# Altium PCB lcd_breakout.PcbDoc
Units mil, origin at the board's own origin, x right, y up, seen from the top; angles counter-clockwise.
Board outline 3080 x 1540 mil, 2 copper layers (Top Layer, Bottom Layer); 3 components, 46 nets, 110 pads, 0 vias.
Unrouted connection lines stored in the file: 48.
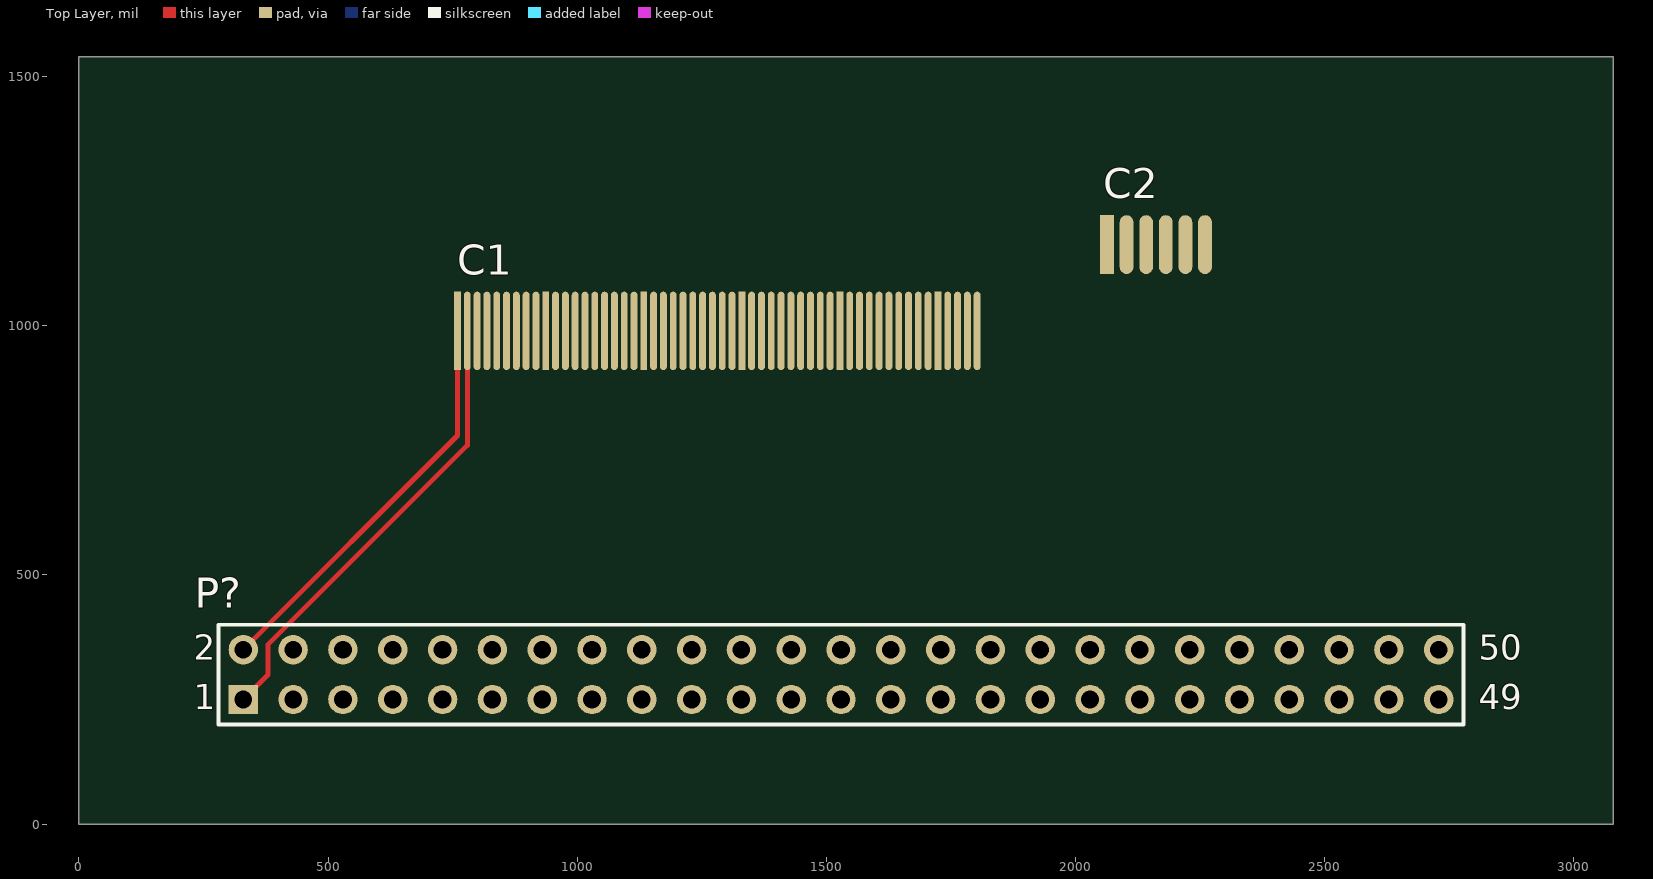
[diagram p0: Top Layer view]
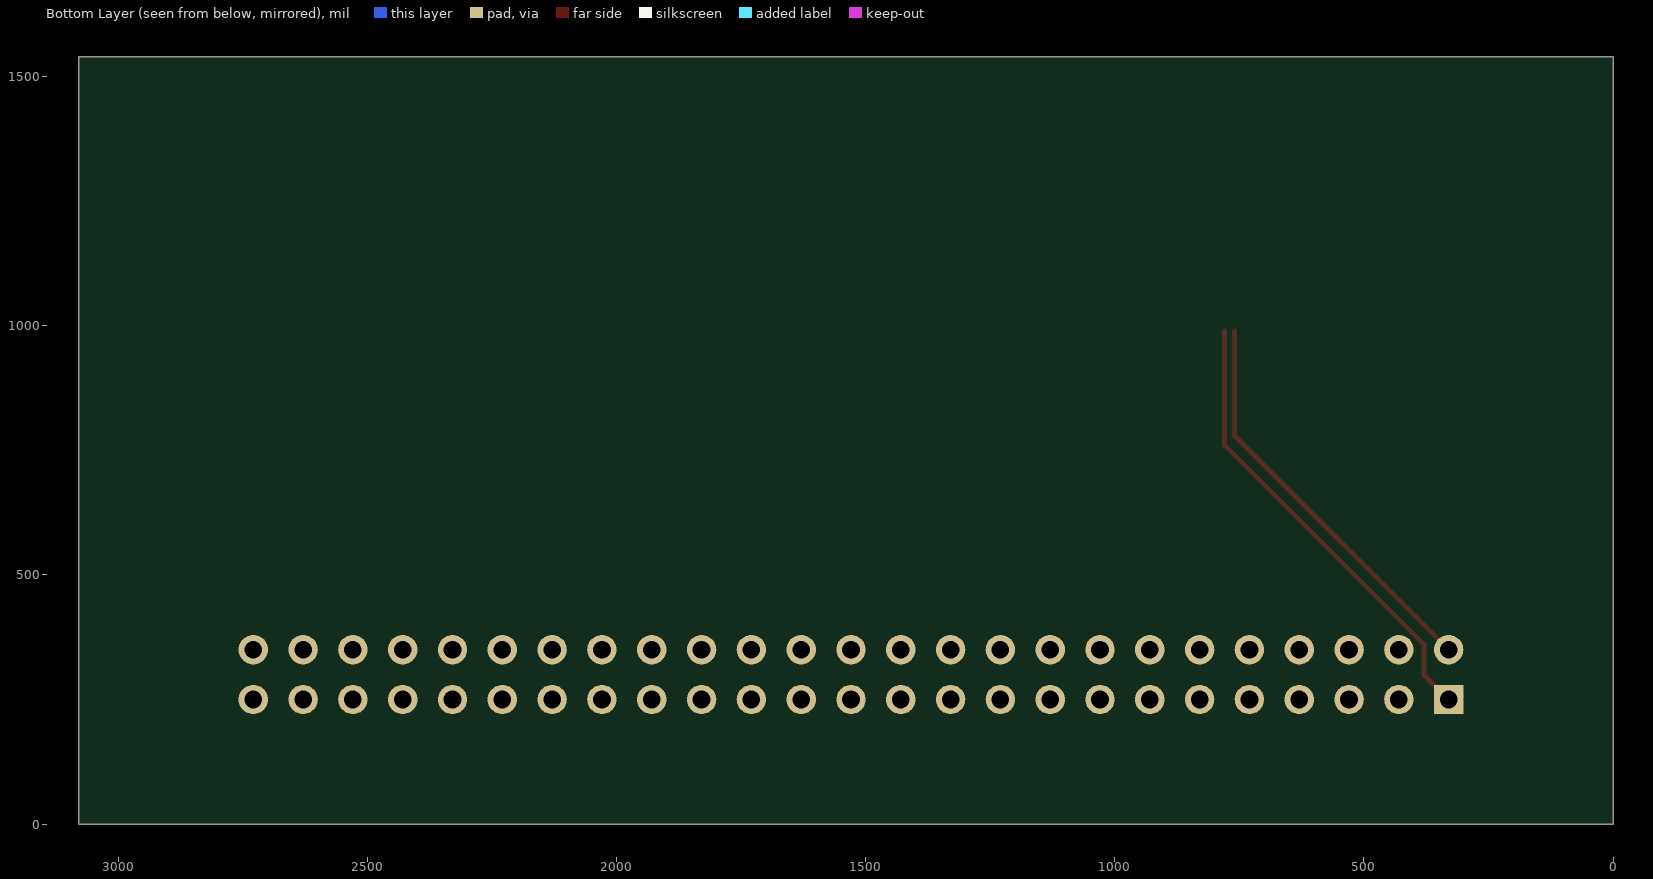
[diagram p1: Bottom Layer view, seen from below]

## Layer stack, top to bottom
Top Solder: solder mask 0.4, Solder Resist, Dk 3.5
Top Layer: signal copper 1.4
Dielectric 1: dielectric 12.6, FR-4, Dk 4.8
Bottom Layer: signal copper 1.4
Bottom Solder: solder mask 0.4, Solder Resist, Dk 3.5

## Board outline
0,0 3080,0 3080,1540 0,1540

## Design rules (kind name [scope] priority, off if disabled: settings)
Clearance [All] p1: gap=5
PolygonConnect [All] p1: connectstyle=Relief reliefconductorwidth=10 reliefentries=4 polygonreliefangle="90 Angle" airgapwidth=10
RoutingVias [All] p1: holewidth=28 width=50 viastyle="Through Hole" minholewidth=28 minwidth=50 maxholewidth=28 maxwidth=50
SolderMaskExpansion [All] p1: expansion=4
Width [All] p1: maxlimit=20 minlimit=10 preferedwidth=20
30 further rules are at their usual default settings.

## Components (designator, comment, footprint, x,y, rotation, side; value= is the part's Value field where it differs from the comment)
C1 "LCD" "Molex54 - duplicate2" 760,990 r0 top
C2 "LCD I2C" Molex6 2063.96,1163.23 r0 top
P? "Header 25X2" HDR2X25 330,250 r0 top

## Footprints (in the part's own frame and the unit in brackets; to place one, negate y for a bottom-side part, rotate by r counter-clockwise, add the part's x,y. Pads: shape width x height; smd on the part's side, far side on the other; paste and mask are expansions set on the pad)
HDR2X25 [mm] "Connector; Header; 25x2 Position"
  rect 1.5x1.5 hole 0.9: 1(0,0)
  round 1.5 hole 0.9: 2(0,2.54) 3(2.54,0) 4(2.54,2.54) 5(5.08,0) 6(5.08,2.54) 7(7.62,0) 8(7.62,2.54) 9(10.16,0) 10(10.16,2.54) 11(12.7,0) 12(12.7,2.54) 13(15.24,0) 14(15.24,2.54) 15(17.78,0) 16(17.78,2.54) 17(20.32,0) 18(20.32,2.54) 19(22.86,0) 20(22.86,2.54) 21(25.4,0) 22(25.4,2.54) 23(27.94,0) 24(27.94,2.54) 25(30.48,0) 26(30.48,2.54) 27(33.02,0) 28(33.02,2.54) 29(35.56,0) 30(35.56,2.54) 31(38.1,0) 32(38.1,2.54) 33(40.64,0) 34(40.64,2.54) 35(43.18,0) 36(43.18,2.54) 37(45.72,0) 38(45.72,2.54) 39(48.26,0) 40(48.26,2.54) 41(50.8,0) 42(50.8,2.54) 43(53.34,0) 44(53.34,2.54) 45(55.88,0) 46(55.88,2.54) 47(58.42,0) 48(58.42,2.54) 49(60.96,0) 50(60.96,2.54)
  silkscreen extent -1.27,-1.27 62.23,3.81
Molex6 [mm]
  rect 0.7x3 smd: 1(0,0)
  oval 0.7x3 smd: 2(1,0) 3(2,0) 4(3,0) 5(4,0) 6(5,0)
"Molex54 - duplicate2" [mm]
  rect 0.35x4 smd: A1(0,0) A10(4.5,0) A20(9.5,0) A30(14.5,0) A40(19.5,0) A50(24.5,0)
  oval 0.35x4 smd: A2(0.5,0) A3(1,0) A4(1.5,0) A5(2,0) A6(2.5,0) A7(3,0) A8(3.5,0) A9(4,0) A11(5,0) A12(5.5,0) A13(6,0) A14(6.5,0) A15(7,0) A16(7.5,0) A17(8,0) A18(8.5,0) A19(9,0) A21(10,0) A22(10.5,0) A23(11,0) A24(11.5,0) A25(12,0) A26(12.5,0) A27(13,0) A28(13.5,0) A29(14,0) A31(15,0) A32(15.5,0) A33(16,0) A34(16.5,0) A35(17,0) A36(17.5,0) A37(18,0) A38(18.5,0) A39(19,0) A41(20,0) A42(20.5,0) A43(21,0) A44(21.5,0) A45(22,0) A46(22.5,0) A47(23,0) A48(23.5,0) A49(24,0) A51(25,0) A52(25.5,0) A53(26,0) A54(26.5,0)

## Part data
P?: "Header, 25-Pin, Dual row"

## Nets (pads, with @x,y where several pads share a name; then routed paths per layer and width w, separated by ;. In a path a pad name is that pad's centre, name@x,y a point inside that pad or via, vN(x,y) a via of type N, cw(c..) or ccw(c..) an arc to the next point about the centre after c; other vN are vias at no path point)
GND: C1.A1 C1.A2 C1.A53 C1.A54 C2.2 P?.1 P?.2 P?.46 | length 1744.4
  Top Layer w10: P?.1 380,300 380,360.63 779.68,760.32 C1.A2 ; P?.2 760,780 C1.A1
LCD3: C1.A3 P?.3
LCD4: C1.A4 P?.4
LCD5: P?.5
LCD6: P?.6
LCD7: P?.7
LCD8: C1.A8 P?.8
LCD9: C1.A9 P?.9
LCD10: C1.A10 P?.10
LCD11: C1.A11 P?.11
LCD12: C1.A12 P?.12
LCD13: C1.A13 P?.13
LCD14: C1.A14 P?.14
LCD15: C1.A15 P?.15
LCD16: C1.A16 P?.16
LCD17: C1.A17 P?.17
LCD18: C1.A18 P?.18
LCD19: C1.A19 P?.19
LCD20: C1.A20 P?.20
LCD21: C1.A21 P?.21
LCD22: C1.A22 P?.22
LCD23: C1.A23 P?.23
LCD24: C1.A24 P?.24
LCD25: C1.A25 P?.25
LCD26: C1.A26 P?.26
LCD27: C1.A27 P?.27
LCD28: C1.A28 P?.28
LCD29: C1.A29 P?.29
LCD30: C1.A30 P?.30
LCD31: C1.A31 P?.31
LCD32: C1.A32 P?.32
LCD33: C1.A33 P?.33
LCD34: C1.A34 P?.34
LCD35: C1.A35 P?.35
LCD36: C1.A36 P?.36
LCD37: C1.A37 P?.37
LCD38: C1.A38 P?.38
LCD39: P?.39
LCD43: C1.A52 P?.43
LCD44: P?.44
LCD45: P?.45
TOUCH3: C2.3 P?.47
TOUCH4: C2.4 P?.48
TOUCH5: C2.5 P?.49
TOUCH6: C2.6 P?.50
VCC: C1.A41 C1.A42 C2.1 P?.40 P?.41 P?.42
pads on no net: C1.A5 C1.A6 C1.A7 C1.A39 C1.A40 C1.A43 C1.A44 C1.A45 C1.A46 C1.A47 C1.A48 C1.A49 C1.A50 C1.A51

## Text inside footprints (layer, text, board x,y; h text height)
P?: Top Overlay "2" at 230,330 h50; Top Overlay "1" at 230,230 h50; Top Overlay "49" at 2810,230 h50; Top Overlay "50" at 2810,330 h50